# Altium PCB LightStickController..PcbDoc
Units mm, origin at the board's own origin, x right, y up, seen from the top; angles counter-clockwise.
Board outline 92.22 x 134 mm, 2 copper layers (Top Layer, Bottom Layer); 1 components, 0 nets, 62 pads, 0 vias.
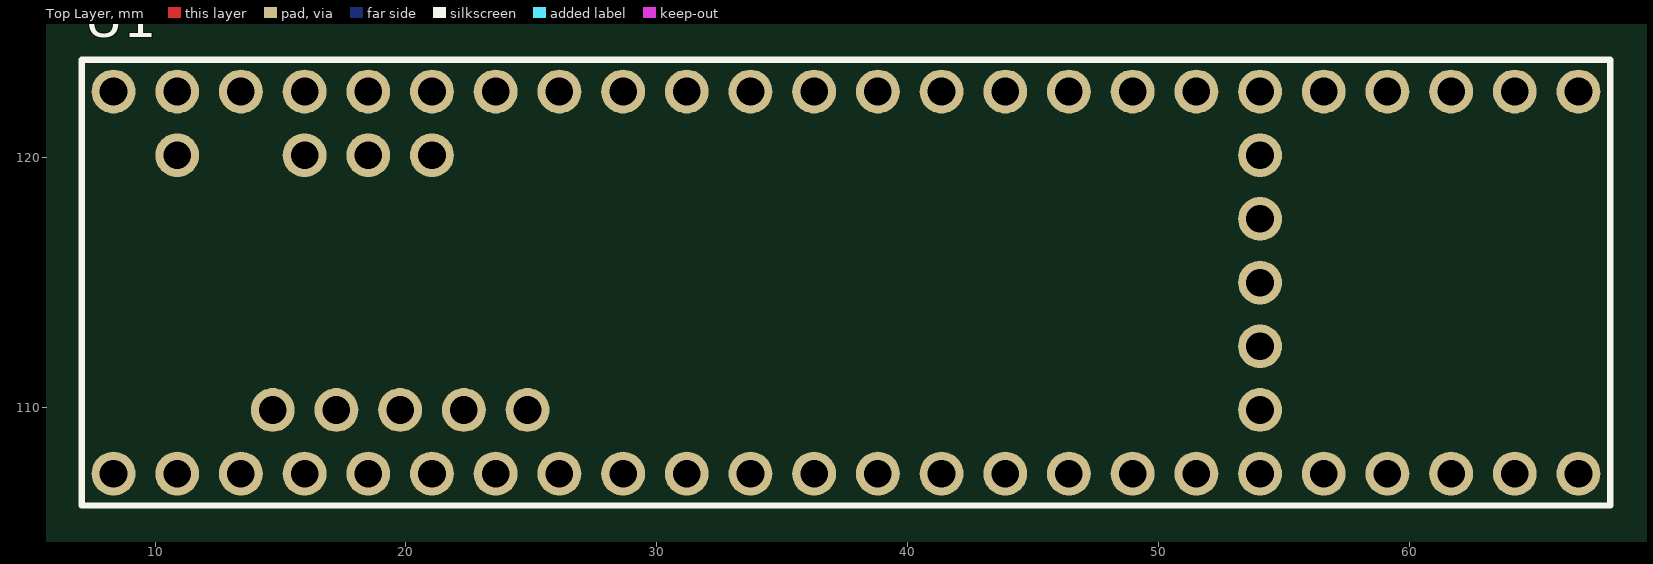
[diagram p0: Top Layer view]
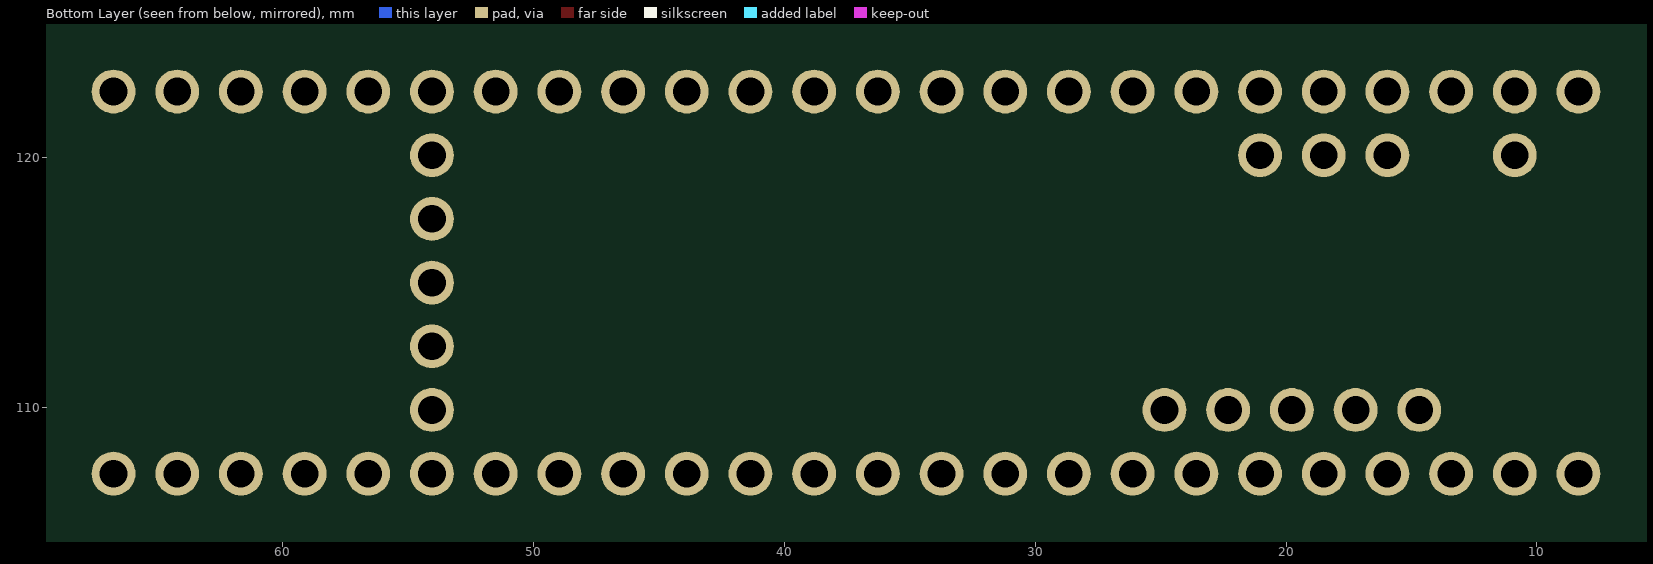
[diagram p1: Bottom Layer view, seen from below]

## Layer stack, top to bottom
Top Solder: solder mask 0.0102, Solder Resist, Dk 3.5
Top Layer: signal copper 0.0356
Dielectric 1: dielectric 0.32, FR-4, Dk 4.8
Bottom Layer: signal copper 0.0356
Bottom Solder: solder mask 0.0102, Solder Resist, Dk 3.5

## Board outline
0,0 cw(c500.213,-12.856) 2.803,41.569 ccw(c-40.097,46.263) 3.059,46.263 3.059,58.124 7.965,60.956 ccw(c5.547,65.144) 3.129,69.332 -1.109,66.886 -5.825,72.506 cw(c3.147,80.034) -8.565,80.034 -8.565,125.308 -0.453,125.308 ccw(c-0.453,130.144) 4.383,130.144 4.383,134 70.71,134 70.71,130.144 ccw(c75.547,130.144) 75.547,125.308 83.659,125.308 83.659,80.034 cw(c71.947,80.034) 80.919,72.506 76.203,66.886 71.965,69.332 ccw(c69.547,65.144) 67.129,60.956 72.034,58.124 72.034,46.263 ccw(c115.19,46.263) 72.29,41.569 cw(c-425.12,-12.856) 75.093,0

## Design rules (kind name [scope] priority, off if disabled: settings)
Clearance [All] p1: gap=0.254
PolygonConnect [All] p1: connectstyle=Relief reliefconductorwidth=0.254 reliefentries=4 polygonreliefangle="90 Angle" airgapwidth=0.254
RoutingVias [All] p1: holewidth=0.711 width=1.27 viastyle="Through Hole" minholewidth=0.711 minwidth=1.27 maxholewidth=0.711 maxwidth=1.27
SolderMaskExpansion [All] p1: expansion=0.102
Width [All] p1: maxlimit=0.254 minlimit=0.254 preferedwidth=0.254
30 further rules are at their usual default settings.

## Components (designator, comment, footprint, x,y, rotation, side; value= is the part's Value field where it differs from the comment)
U1 "Teensy 3.5" TEENSY3.5 37.547,115 r90 top locked

## Footprints (in the part's own frame and the unit in brackets; to place one, negate y for a bottom-side part, rotate by r counter-clockwise, add the part's x,y. Pads: shape width x height; smd on the part's side, far side on the other; paste and mask are expansions set on the pad)
TEENSY3.5 [mm] "https://www.pjrc.com/teensy/"
  round 1.75 hole 1.1: 1(-7.62,29.21) 2(-7.62,26.67) 3(-7.62,24.13) 4(-7.62,21.59) 5(-7.62,19.05) 6(-7.62,16.51) 7(-7.62,13.97) 8(-7.62,11.43) 9(-7.62,8.89) 10(-7.62,6.35) 11(-7.62,3.81) 12(-7.62,1.27) 13(-7.62,-1.27) 14(-7.62,-3.81) 15(-7.62,-6.35) 16(-7.62,-8.89) 17(-7.62,-11.43) 18(-7.62,-13.97) 19(-7.62,-16.51) 20(-7.62,-19.05) 21(-7.62,-21.59) 22(-7.62,-24.13) 23(-7.62,-26.67) 24(-7.62,-29.21) 25(7.62,-29.21) 26(7.62,-26.67) 27(7.62,-24.13) 28(7.62,-21.59) 29(7.62,-19.05) 30(7.62,-16.51) 31(7.62,-13.97) 32(7.62,-11.43) 33(7.62,-8.89) 34(7.62,-6.35) 35(7.62,-3.81) 36(7.62,-1.27) 37(7.62,1.27) 38(7.62,3.81) 39(7.62,6.35) 40(7.62,8.89) 41(7.62,11.43) 42(7.62,13.97) 43(7.62,16.51) 44(7.62,19.05) 45(7.62,21.59) 46(7.62,24.13) 47(7.62,26.67) 48(7.62,29.21) 49(-5.08,-16.51) 50(-2.54,-16.51) 51(0,-16.51) 52(2.54,-16.51) 53(5.08,-16.51) 54(5.08,26.67) 55(5.08,21.59) 56(5.08,19.05) 57(5.08,16.51) 58(-5.08,22.86) 59(-5.08,20.32) 60(-5.08,17.78) 61(-5.08,15.24) 62(-5.08,12.7)
  silkscreen extent -8.89,-30.48 8.89,30.48, body extent -9.02,-30.61 9.02,30.61, height 1.57

## Nets (pads, with @x,y where several pads share a name; then routed paths per layer and width w, separated by ;. In a path a pad name is that pad's centre, name@x,y a point inside that pad or via, vN(x,y) a via of type N, cw(c..) or ccw(c..) an arc to the next point about the centre after c; other vN are vias at no path point)
pads on no net: U1.1 U1.2 U1.3 U1.4 U1.5 U1.6 U1.7 U1.8 U1.9 U1.10 U1.11 U1.12 U1.13 U1.14 U1.15 U1.16 U1.17 U1.18 U1.19 U1.20 U1.21 U1.22 U1.23 U1.24 U1.25 U1.26 U1.27 U1.28 U1.29 U1.30 U1.31 U1.32 U1.33 U1.34 U1.35 U1.36 U1.37 U1.38 U1.39 U1.40 U1.41 U1.42 U1.43 U1.44 U1.45 U1.46 U1.47 U1.48 U1.49 U1.50 U1.51 U1.52 U1.53 U1.54 U1.55 U1.56 U1.57 U1.58 U1.59 U1.60 U1.61 U1.62

## Keep-outs
Keep-Out Layer:
  circle w0.254: c10.025,3.15 r3
  circle w0.254: c65.05,3.15 r3
  circle w0.254: c65.05,53.15 r3
  circle w0.254: c10.05,53.15 r3
  circle w0.254: c-3.45,81.15 r3
  circle w0.254: c78.55,81.15 r3
  circle w0.254: c78.55,121.15 r3
  circle w0.254: c65.05,130.15 r3
  circle w0.254: c-3.425,121.15 r3
  circle w0.254: c10.05,130.15 r3

## Silkscreen, mask and mechanical layers (free items; w line width, h text height)
Mechanical 7:
  circle w0.5: c10.047,3.144 r1.5
  circle w0.5: c10.047,53.144 r1.5
  circle w0.5: c-3.453,81.144 r1.5
  circle w0.5: c-3.453,121.144 r1.5
  circle w0.5: c10.047,130.144 r1.5
  circle w0.5: c65.047,3.144 r1.5
  circle w0.5: c65.047,53.144 r1.5
  circle w0.5: c78.547,81.144 r1.5
  circle w0.5: c78.547,121.144 r1.5
  circle w0.5: c65.047,130.144 r1.5
  lines w0.5: -8.565,80.034 ccw(c3.147,80.034) -5.825,72.506 -1.109,66.886 3.129,69.332 cw(c5.547,65.144) 7.965,60.956 3.059,58.124 3.059,46.263 cw(c-40.097,46.263) 2.803,41.569 ccw(c500.213,-12.856) 0,0 75.093,0 ccw(c-425.12,-12.856) 72.29,41.569 cw(c115.19,46.263) 72.034,46.263 72.034,58.124 67.129,60.956 cw(c69.547,65.144) 71.965,69.332 76.203,66.886 80.919,72.506 ccw(c71.947,80.034) 83.659,80.034 83.659,125.308 75.547,125.308 cw(c75.547,130.144) 70.71,130.144 70.71,134 4.383,134 4.383,130.144 cw(c-0.453,130.144) -0.453,125.308 -8.565,125.308 -8.565,80.034